# Altium PCB Sitara_Project_Rev_A_PCB.PcbDoc (part 8 of 9)
Units mm, origin at the board's own origin, x right, y up, seen from the top; angles counter-clockwise.
Board outline 120 x 85 mm, 8 copper layers (L1 (Sig), L2 (GND), L3 (PWR), L4 (Sig), L5 (GND), L6 (Sig), L7 (GND), L8 (Sig)), stack 1.188 mm thick; 458 components, 357 nets, 1916 pads, 1164 vias.
Unrouted connection lines stored in the file: 516.
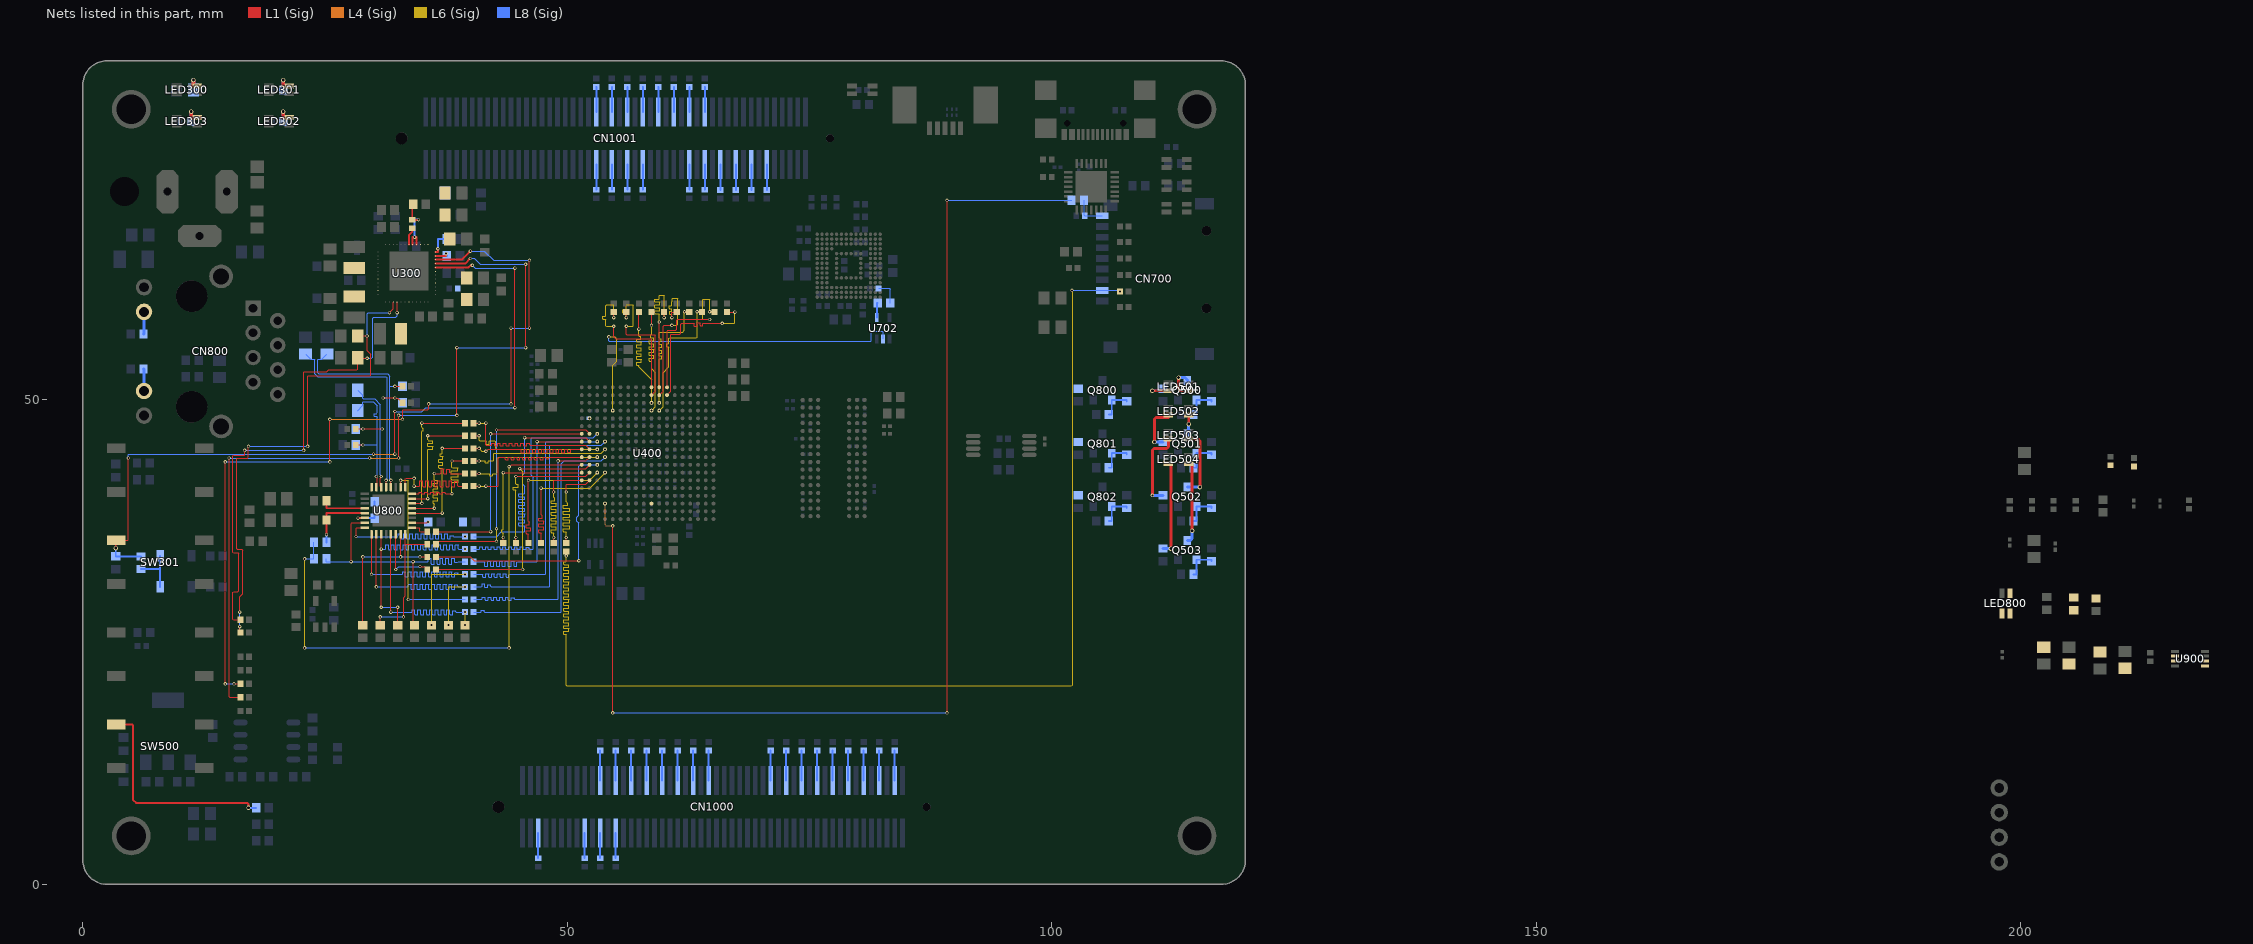
[diagram p11: the nets of this part, all layers, seen from the top]

## Via types
v1: diameter 0.35, hole 0.2, L1 (Sig) to L8 (Sig), tented both sides, 846 vias
v2: diameter 0.45, hole 0.3, L1 (Sig) to L8 (Sig), tented both sides, 302 vias
v3: diameter 0.45/0.45/0.45/0.45/0.45/0.45/0.45/0.45 (per signal layer), hole 0.3, L1 (Sig) to L8 (Sig), tented both sides, 16 vias

## Nets (pads, with @x,y where several pads share a name; then routed paths per layer and width w, separated by ;. In a path a pad name is that pad's centre, name@x,y a point inside that pad or via, vN(x,y) a via of type N, cw(c..) or ccw(c..) an arc to the next point about the centre after c; other vN are vias at no path point) (continued)
MICRO_SD_DAT3: CN700.2 R709.1 R716.2 | length 123.8
  L1 (Sig) w0.1: v1(49.9,33.9) R716.2@49.9,34.36
  L6 (Sig) w0.1: v1(49.9,33.9) 49.9,33.5 49.9,33.367 49.841,33.309 49.672,33.309 49.657,33.294 49.657,33.024 49.672,33.009 50.135,33.009 50.15,32.994 50.15,32.724 50.135,32.709 49.665,32.709 49.65,32.694 49.65,32.424 49.665,32.409 50.135,32.409 50.15,32.394 50.15,32.124 50.135,32.109 49.665,32.109 49.65,32.094 49.65,31.824 49.665,31.809 50.135,31.809 50.15,31.794 50.15,31.524 50.135,31.509 49.665,31.509 49.65,31.494 49.65,31.224 49.665,31.209 50.135,31.209 50.15,31.194 50.15,30.924 50.135,30.909 49.665,30.909 49.65,30.894 49.65,30.624 49.665,30.609 50.135,30.609 50.15,30.594 50.15,30.324 50.135,30.309 49.665,30.309 49.65,30.294 49.65,30.024 49.665,30.009 50.135,30.009 50.15,29.994 50.15,29.724 50.135,29.709 49.665,29.709 49.65,29.694 49.65,29.424 49.665,29.409 50.135,29.409 50.15,29.394 50.15,29.124 50.135,29.109 49.665,29.109 49.65,29.094 49.65,28.824 49.665,28.809 50.135,28.809 50.15,28.794 50.15,28.524 50.135,28.509 49.665,28.509 49.65,28.494 49.65,28.224 49.665,28.209 50.135,28.209 50.15,28.194 50.15,27.924 50.135,27.909 49.665,27.909 49.65,27.894 49.65,27.624 49.665,27.609 50.135,27.609 50.15,27.594 50.15,27.324 50.135,27.309 49.665,27.309 49.65,27.294 49.65,27.024 49.665,27.009 50.135,27.009 50.15,26.994 50.15,26.724 50.135,26.709 49.665,26.709 49.65,26.694 49.65,26.424 49.665,26.409 50.135,26.409 50.15,26.394 50.15,26.124 50.135,26.109 49.665,26.109 49.65,26.094 49.65,25.824 49.665,25.809 49.841,25.809 49.9,25.75 49.9,25.7 49.9,20.559 49.959,20.5 102.041,20.5 102.1,20.559 v1(102.1,61.3)
  L8 (Sig) w0.1: v1(102.1,61.3) 105.223,61.3 CN700.2@105.224,61.299 106.893,61.299 106.992,61.2 v1(107.06,61.2)
MII1_COL: R814.1 U400.H16 | length 26.8
  L1 (Sig) w0.1: R814.1@36.44,33.8 40,33.8 40.4,33.4 v1(51.2,33.4)
  L8 (Sig) w0.1: v1(51.2,33.4) 51.2,37.3 51,37.5 51,37.9 51.2,38.1 51.2,43.141 51.359,43.3 v1(53.1,43.3)
MII1_CRS_DV: R816.1 U400.H17 | length 26.8
  L1 (Sig) w0.1: R816.1@36.44,32.5 v1(45.4,32.5) ; v1(45.1,42.9) 51.9,42.9 U400.H17@52.3,43.3
  L6 (Sig) w0.1: v1(45.1,42.9) 45.4,42.6 v1(45.4,32.5)
MII1_MDIO_CLK: R818.1 U400.M18 | length 25.2
  L1 (Sig) w0.1: R818.1@36.44,36.4 v1(42.1,36.4) ; v1(42.1,46.5) U400.M18@51.5,46.5
  L8 (Sig) w0.1: v1(42.1,36.4) v1(42.1,46.5)
MII1_MDIO_DATA: R817.1 U400.M17 | length 27.7
  L1 (Sig) w0.1: R817.1@36.44,35.1 36.44,35.12 36.69,35.37 36.71,35.37 36.74,35.4 v1(42.7,35.4) ; v1(42.7,46.9) 51.9,46.9 U400.M17@52.3,46.5
  L6 (Sig) w0.1: v1(42.7,35.4) v1(42.7,36.7)
  L8 (Sig) w0.1: v1(42.7,36.7) v1(42.7,46.9)
MII1_REFCLK: R813.1 R815.1 U400.H18 | length 59.2
  L1 (Sig) w0.1: v1(44,43.1) 44.06,43.1 44.26,43.3 U400.H18@51.5,43.3
  L6 (Sig) w0.1: v1(22.9,24.4) v1(22.9,33.6) ; v1(44,24.4) v1(44,43.1)
  L8 (Sig) w0.1: v1(22.9,24.4) v1(44,24.4) ; v1(22.9,33.6) R813.1@23.85,33.6 R815.1@23.85,35.3
MII1_RXCLK: R806.1 U400.L18 | length 29.4
  L1 (Sig) w0.1: v1(46.9,45.7) U400.L18@51.5,45.7
  L8 (Sig) w0.1: R806.1@40.34,33.3 41.1,33.3 41.45,33.3 41.509,33.241 41.509,32.825 41.524,32.81 41.794,32.81 41.809,32.825 41.809,33.311 41.824,33.326 42.094,33.326 42.109,33.311 42.109,32.825 42.124,32.81 42.394,32.81 42.409,32.825 42.409,33.311 42.424,33.326 42.694,33.326 42.709,33.311 42.709,32.825 42.724,32.81 42.994,32.81 43.009,32.825 43.009,33.311 43.024,33.326 43.294,33.326 43.309,33.311 43.309,32.825 43.324,32.81 43.594,32.81 43.609,32.825 43.609,33.311 43.624,33.326 43.894,33.326 43.909,33.311 43.909,32.825 43.924,32.81 44.194,32.81 44.209,32.825 44.209,33.311 44.224,33.326 44.494,33.326 44.509,33.311 44.509,32.842 44.524,32.827 44.794,32.827 44.809,32.842 44.809,33.241 44.867,33.3 45.073,33.3 46.841,33.3 46.9,33.359 v1(46.9,45.7)
MII1_RXD0: R807.1 U400.M16 | length 29.4
  L8 (Sig) w0.1: R807.1@40.34,34.6 40.856,34.6 40.906,34.6 40.965,34.659 40.965,34.843 40.98,34.858 41.25,34.858 41.265,34.843 41.265,34.579 41.28,34.564 41.55,34.564 41.565,34.579 41.565,34.843 41.58,34.858 41.85,34.858 41.865,34.843 41.865,34.579 41.88,34.564 42.15,34.564 42.165,34.579 42.165,34.843 42.18,34.858 42.45,34.858 42.465,34.843 42.465,34.579 42.48,34.564 42.75,34.564 42.765,34.579 42.765,34.843 42.78,34.858 43.05,34.858 43.065,34.843 43.065,34.579 43.08,34.564 43.35,34.564 43.365,34.579 43.365,34.843 43.38,34.858 43.65,34.858 43.665,34.843 43.665,34.579 43.68,34.564 43.95,34.564 43.965,34.579 43.965,34.843 43.98,34.858 44.25,34.858 44.265,34.843 44.265,34.579 44.28,34.564 44.55,34.564 44.565,34.579 44.565,34.843 44.58,34.858 44.85,34.858 44.865,34.843 44.865,34.579 44.88,34.564 45.15,34.564 45.165,34.579 45.165,34.843 45.18,34.858 45.45,34.858 45.465,34.843 45.465,34.579 45.48,34.564 45.75,34.564 45.765,34.579 45.765,34.776 45.78,34.791 46.05,34.791 46.065,34.776 46.065,34.659 46.123,34.6 46.268,34.6 46.441,34.6 46.5,34.659 46.5,42 46.3,42.2 46.3,46.041 46.359,46.1 52.7,46.1 v1(53.1,46.5)
MII1_RXD1: R808.1 U400.L15 | length 29.4
  L8 (Sig) w0.1: R808.1@40.34,30.7 41.1,30.7 41.15,30.7 41.208,30.759 41.208,31.035 41.223,31.05 41.493,31.05 41.508,31.035 41.508,30.669 41.523,30.654 41.793,30.654 41.808,30.669 41.808,30.902 41.823,30.917 42.093,30.917 42.108,30.902 42.108,30.759 42.167,30.7 42.305,30.7 48.141,30.7 48.2,30.759 48.2,45.241 48.259,45.3 53.5,45.3 v1(53.9,45.7)
MII1_RXD2: R809.1 U400.L16 | length 29.4
  L8 (Sig) w0.1: R809.1@40.34,32 40.88,32 41.23,32 41.288,31.941 41.288,31.722 41.303,31.707 41.573,31.707 41.588,31.722 41.588,32.02 41.603,32.035 41.873,32.035 41.888,32.02 41.888,31.722 41.903,31.707 42.173,31.707 42.188,31.722 42.188,32.02 42.203,32.035 42.473,32.035 42.488,32.02 42.488,31.722 42.503,31.707 42.773,31.707 42.788,31.722 42.788,32.02 42.803,32.035 43.073,32.035 43.088,32.02 43.088,31.722 43.103,31.707 43.373,31.707 43.388,31.722 43.388,32.02 43.403,32.035 43.673,32.035 43.688,32.02 43.688,31.727 43.703,31.712 43.973,31.712 43.988,31.727 43.988,31.941 44.047,32 44.392,32 47.741,32 47.8,32.059 47.8,45.641 47.859,45.7 v1(53.1,45.7)
MII1_RXD3: R810.1 U400.L17 | length 29.4
  L1 (Sig) w0.1: v1(45.6,46.1) 51.9,46.1 U400.L17@52.3,45.7
  L8 (Sig) w0.1: R810.1@40.34,35.9 42.7,35.9 43.2,36.4 45.541,36.4 45.6,36.459 45.6,36.92 45.6,36.97 45.541,37.029 44.997,37.029 44.982,37.044 44.982,37.314 44.997,37.329 45.59,37.329 45.605,37.344 45.605,37.614 45.59,37.629 44.997,37.629 44.982,37.644 44.982,37.914 44.997,37.929 45.59,37.929 45.605,37.944 45.605,38.214 45.59,38.229 44.997,38.229 44.982,38.244 44.982,38.514 44.997,38.529 45.59,38.529 45.605,38.544 45.605,38.814 45.59,38.829 44.997,38.829 44.982,38.844 44.982,39.114 44.997,39.129 45.59,39.129 45.605,39.144 45.605,39.414 45.59,39.429 44.997,39.429 44.982,39.444 44.982,39.714 44.997,39.729 45.59,39.729 45.605,39.744 45.605,40.014 45.59,40.029 44.999,40.029 44.984,40.044 44.984,40.314 44.999,40.329 45.541,40.329 45.6,40.387 45.6,40.954 45.6,41.1 45.4,41.3 45.4,42.3 45.6,42.5 v1(45.6,46.1)
MII1_RXDV: R811.1 U400.J17 | length 29.4
  L1 (Sig) w0.1: v1(49.055,43.709) 49.063,43.7 51.9,43.7 U400.J17@52.3,44.1
  L8 (Sig) w0.1: R811.1@40.34,29.4 41.123,29.4 41.173,29.4 41.232,29.459 41.232,29.621 41.247,29.636 41.517,29.636 41.532,29.621 41.532,29.362 41.547,29.347 41.817,29.347 41.832,29.362 41.832,29.621 41.847,29.636 42.117,29.636 42.132,29.621 42.132,29.362 42.147,29.347 42.417,29.347 42.432,29.362 42.432,29.621 42.447,29.636 42.717,29.636 42.732,29.621 42.732,29.362 42.747,29.347 43.017,29.347 43.032,29.362 43.032,29.621 43.047,29.636 43.317,29.636 43.332,29.621 43.332,29.362 43.347,29.347 43.617,29.347 43.632,29.362 43.632,29.621 43.647,29.636 43.917,29.636 43.932,29.621 43.932,29.362 43.947,29.347 44.217,29.347 44.232,29.362 44.232,29.553 44.247,29.568 44.517,29.568 44.532,29.553 44.532,29.459 44.59,29.4 44.849,29.4 48.996,29.4 49.055,29.459 v1(49.055,43.709)
MII1_RXER: R812.1 U400.J15 | length 29.4
  L8 (Sig) w0.1: R812.1@40.34,28.1 41,28.1 41.05,28.1 41.109,28.159 41.109,28.251 41.124,28.266 41.394,28.266 41.409,28.251 41.409,28.159 41.467,28.1 41.646,28.1 49.341,28.1 49.4,28.159 49.4,43.4 49.7,43.7 53.5,43.7 v1(53.9,44.1)
MII1_TXCLK: R800.1 U400.K18 | length 17.8
  L1 (Sig) w0.1: R800.1@40.34,45 v1(40.9,45) ; v1(41.6,44.7) 41.66,44.7 41.86,44.9 44.835,44.9 45.185,44.9 45.243,44.841 45.243,44.539 45.258,44.524 45.528,44.524 45.543,44.539 45.543,44.896 45.558,44.911 45.828,44.911 45.843,44.896 45.843,44.539 45.858,44.524 46.128,44.524 46.143,44.539 46.143,44.896 46.158,44.911 46.428,44.911 46.443,44.896 46.443,44.539 46.458,44.524 46.728,44.524 46.743,44.539 46.743,44.896 46.758,44.911 47.028,44.911 47.043,44.896 47.043,44.539 47.058,44.524 47.328,44.524 47.343,44.539 47.343,44.896 47.358,44.911 47.628,44.911 47.643,44.896 47.643,44.539 47.658,44.524 47.928,44.524 47.943,44.539 47.943,44.896 47.958,44.911 48.228,44.911 48.243,44.896 48.243,44.539 48.258,44.524 48.528,44.524 48.543,44.539 48.543,44.896 48.558,44.911 48.828,44.911 48.843,44.896 48.843,44.539 48.858,44.524 49.128,44.524 49.143,44.539 49.143,44.896 49.158,44.911 49.428,44.911 49.443,44.896 49.443,44.539 49.458,44.524 49.728,44.524 49.743,44.539 49.743,44.896 49.758,44.911 50.028,44.911 50.043,44.896 50.043,44.597 50.058,44.582 50.328,44.582 50.343,44.597 50.343,44.841 50.402,44.9 50.995,44.9 U400.K18@51.5,44.9
  L6 (Sig) w0.1: v1(40.9,45) 41.2,44.7 v1(41.6,44.7)
MII1_TXD0: R802.1 U400.K17 | length 17.9
  L1 (Sig) w0.1: R802.1@40.34,47.6 v1(40.9,47.6) ; v1(41.6,47.6) 41.6,45.359 41.623,45.336 41.659,45.3 42.151,45.3 42.21,45.359 42.21,45.493 42.225,45.508 42.495,45.508 42.51,45.493 42.51,45.272 42.525,45.257 42.795,45.257 42.81,45.272 42.81,45.521 42.825,45.536 43.095,45.536 43.11,45.521 43.11,45.272 43.125,45.257 43.395,45.257 43.41,45.272 43.41,45.521 43.425,45.536 43.695,45.536 43.71,45.521 43.71,45.272 43.725,45.257 43.995,45.257 44.01,45.272 44.01,45.521 44.025,45.536 44.295,45.536 44.31,45.521 44.31,45.272 44.325,45.257 44.595,45.257 44.61,45.272 44.61,45.521 44.625,45.536 44.895,45.536 44.91,45.521 44.91,45.272 44.925,45.257 45.195,45.257 45.21,45.272 45.21,45.521 45.225,45.536 45.495,45.536 45.51,45.521 45.51,45.272 45.525,45.257 45.795,45.257 45.81,45.272 45.81,45.521 45.825,45.536 46.095,45.536 46.11,45.521 46.11,45.359 46.168,45.3 46.518,45.3 51.9,45.3 U400.K17@52.3,44.9
  L6 (Sig) w0.1: v1(40.9,47.6) v1(41.6,47.6)
MII1_TXD1: R803.1 U400.K16 | length 14.7
  L1 (Sig) w0.1: R803.1@40.34,46.3 v1(40.9,46.3)
  L6 (Sig) w0.1: v1(40.9,46.3) 40.9,45.859 40.959,45.8 41.444,45.8 41.605,45.8 41.663,45.741 41.663,45.421 41.678,45.406 41.948,45.406 41.963,45.421 41.963,45.741 42.022,45.8 42.072,45.8 42.541,45.8 42.6,45.741 42.6,45 42.7,44.9 v1(53.1,44.9)
MII1_TXD2: R804.1 U400.K15 | length 14.7
  L1 (Sig) w0.1: R804.1@40.34,43.7 v1(40.9,43.7)
  L6 (Sig) w0.1: v1(40.9,43.7) 41.141,43.7 41.491,43.7 41.55,43.641 41.55,43.533 41.565,43.518 41.835,43.518 41.85,43.533 41.85,43.641 41.909,43.7 42.106,43.7 42.341,43.7 42.4,43.759 42.4,44.441 42.459,44.5 53.5,44.5 v1(53.9,44.9)
MII1_TXD3: R805.1 U400.J18 | length 17.9
  L1 (Sig) w0.1: R805.1@40.34,41.1 v1(40.9,41.1) ; v1(41.6,41.1) 42.841,41.1 42.9,41.159 42.9,44 43,44.1 43.209,44.1 43.559,44.1 43.617,44.041 43.617,43.853 43.632,43.838 43.902,43.838 43.917,43.853 43.917,44.092 43.932,44.107 44.202,44.107 44.217,44.092 44.217,43.853 44.232,43.838 44.502,43.838 44.517,43.853 44.517,44.092 44.532,44.107 44.802,44.107 44.817,44.092 44.817,43.853 44.832,43.838 45.102,43.838 45.117,43.853 45.117,44.092 45.132,44.107 45.402,44.107 45.417,44.092 45.417,43.853 45.432,43.838 45.702,43.838 45.717,43.853 45.717,44.092 45.732,44.107 46.002,44.107 46.017,44.092 46.017,43.853 46.032,43.838 46.302,43.838 46.317,43.853 46.317,44.092 46.332,44.107 46.602,44.107 46.617,44.092 46.617,43.853 46.632,43.838 46.902,43.838 46.917,43.853 46.917,44.092 46.932,44.107 47.202,44.107 47.217,44.092 47.217,43.853 47.232,43.838 47.502,43.838 47.517,43.853 47.517,44.092 47.532,44.107 47.802,44.107 47.817,44.092 47.817,43.93 47.832,43.915 48.102,43.915 48.117,43.93 48.117,44.041 48.176,44.1 48.315,44.1 U400.J18@51.5,44.1
  L6 (Sig) w0.1: v1(40.9,41.1) v1(41.6,41.1)
MII1_TXEN: R801.1 U400.J16 | length 14.7
  L1 (Sig) w0.1: R801.1@40.34,42.4 v1(40.9,42.4)
  L6 (Sig) w0.1: v1(40.9,42.4) 41.584,42.4 41.934,42.4 41.993,42.341 41.993,42.2 42.008,42.185 42.278,42.185 42.293,42.2 42.293,42.341 42.351,42.4 42.681,42.4 42.741,42.4 42.8,42.459 42.8,44.041 42.859,44.1 v1(53.1,44.1)
MMC0_CD: R711.2 U400.C15 | length 122.6
  L1 (Sig) w0.1: v1(54.7,17.7) v1(54.7,37) ; v1(89.2,17.7) v1(89.2,70.6)
  L4 (Sig) w0.1: v1(53.9,39.3) 53.9,37.1 54,37 v1(54.7,37)
  L8 (Sig) w0.1: v1(54.7,17.7) v1(89.2,17.7) ; v1(89.2,70.6) R711.2@102.05,70.6
MMC0_CLK: R710.1 U400.G17 | length 15.5
  L1 (Sig) w0.1: R710.1@44.7,35.24 v1(44.7,35.8) ; v1(44.7,42.1) 51.9,42.1 U400.G17@52.3,42.5
  L6 (Sig) w0.1: v1(44.7,35.8) 44.7,40.6 44.7,40.65 44.641,40.709 44.465,40.709 44.45,40.724 44.45,40.994 44.465,41.009 44.925,41.009 44.94,41.024 44.94,41.294 44.925,41.309 44.759,41.309 44.7,41.367 44.7,41.6 v1(44.7,42.1)
MMC0_CMD: R712.1 U400.G18 | length 15.6
  L1 (Sig) w0.1: R712.1@43.4,35.24 v1(43.4,35.8) ; v1(43.4,42.5) U400.G18@51.5,42.5
  L6 (Sig) w0.1: v1(43.4,35.8) 43.4,36.2 43.4,36.25 43.341,36.309 43.269,36.309 43.254,36.324 43.254,36.594 43.269,36.609 43.341,36.609 43.4,36.667 43.4,36.8 v1(43.4,42.5)
MMC0_DAT0: R713.1 U400.G16 | length 15.4
  L1 (Sig) w0.1: R713.1@46,35.24 46,36.1 46,36.15 45.941,36.209 45.765,36.209 45.75,36.224 45.75,36.494 45.765,36.509 46.235,36.509 46.25,36.524 46.25,36.794 46.235,36.809 45.765,36.809 45.75,36.824 45.75,37.094 45.765,37.109 46.081,37.109 46.096,37.124 46.096,37.394 46.081,37.409 46.059,37.409 46,37.467 46,37.7 v1(46,41.7)
  L6 (Sig) w0.1: v1(46,41.7) 52.3,41.7 v1(53.1,42.5)
MMC0_DAT1: R714.1 U400.G15 | length 15.5
  L1 (Sig) w0.1: R714.1@47.3,35.24 47.3,36.2 47.3,36.25 47.241,36.309 47.065,36.309 47.05,36.324 47.05,36.594 47.065,36.609 47.535,36.609 47.55,36.624 47.55,36.894 47.535,36.909 47.065,36.909 47.05,36.924 47.05,37.194 47.065,37.209 47.535,37.209 47.55,37.224 47.55,37.494 47.535,37.509 47.065,37.509 47.05,37.524 47.05,37.794 47.065,37.809 47.402,37.809 47.417,37.824 47.417,38.094 47.402,38.109 47.359,38.109 47.3,38.167 47.3,38.5 v1(47.3,40.9)
  L6 (Sig) w0.1: v1(47.3,40.9) 52.3,40.9 v1(53.9,42.5)
MMC0_DAT2: R715.1 U400.F18 | length 14.8
  L1 (Sig) w0.1: R715.1@48.6,35.24 v1(48.6,35.8) ; v1(48.6,40.5) 48.6,41.641 48.659,41.7 U400.F18@51.5,41.7
  L6 (Sig) w0.1: v1(48.6,35.8) 48.6,36.2 48.6,36.25 48.541,36.309 48.365,36.309 48.35,36.324 48.35,36.594 48.365,36.609 48.835,36.609 48.85,36.624 48.85,36.894 48.835,36.909 48.365,36.909 48.35,36.924 48.35,37.194 48.365,37.209 48.835,37.209 48.85,37.224 48.85,37.494 48.835,37.509 48.365,37.509 48.35,37.524 48.35,37.794 48.365,37.809 48.835,37.809 48.85,37.824 48.85,38.094 48.835,38.109 48.365,38.109 48.35,38.124 48.35,38.394 48.365,38.409 48.835,38.409 48.85,38.424 48.85,38.694 48.835,38.709 48.365,38.709 48.35,38.724 48.35,38.994 48.365,39.009 48.835,39.009 48.85,39.024 48.85,39.294 48.835,39.309 48.365,39.309 48.35,39.324 48.35,39.594 48.365,39.609 48.714,39.609 48.729,39.624 48.729,39.894 48.714,39.909 48.659,39.909 48.6,39.967 48.6,40.2 v1(48.6,40.5)
MMC0_DAT3: R716.1 U400.F17 | length 14.7
  L1 (Sig) w0.1: R716.1@49.9,35.24 v1(49.9,35.8) ; v1(49.9,40.5) 49.9,41.241 49.959,41.3 51.9,41.3 U400.F17@52.3,41.7
  L6 (Sig) w0.1: v1(49.9,35.8) 49.9,36.3 49.9,36.35 49.841,36.409 49.578,36.409 49.563,36.424 49.563,36.694 49.578,36.709 50.219,36.709 50.234,36.724 50.234,36.994 50.219,37.009 49.578,37.009 49.563,37.024 49.563,37.294 49.578,37.309 50.219,37.309 50.234,37.324 50.234,37.594 50.219,37.609 49.578,37.609 49.563,37.624 49.563,37.894 49.578,37.909 50.219,37.909 50.234,37.924 50.234,38.194 50.219,38.209 49.578,38.209 49.563,38.224 49.563,38.494 49.578,38.509 50.219,38.509 50.234,38.524 50.234,38.794 50.219,38.809 49.578,38.809 49.563,38.824 49.563,39.094 49.578,39.109 50.025,39.109 50.04,39.124 50.04,39.394 50.025,39.409 49.959,39.409 49.9,39.467 49.9,39.707 v1(49.9,40.5)
MMC1_CLK: R719.2 U400.U9 | length 16.2
  L1 (Sig) w0.1: v1(56.1,57.6) 56.1,56.759 56.159,56.7 59.041,56.7 59.1,56.641 59.1,50.9 U400.U9@58.7,50.5 ; v1(56.1,58.5) R719.2@56.1,59.06
  L6 (Sig) w0.1: v1(56.1,57.6) 56.741,57.6 56.8,57.659 56.8,59.741 56.741,59.8 56.159,59.8 56.1,59.741 56.1,59.693 56.1,59.343 56.041,59.285 55.729,59.285 55.714,59.27 55.714,59 55.729,58.985 56.041,58.985 56.1,58.926 56.1,58.803 v1(56.1,58.5)
MMC1_CMD: R725.2 U400.V9 | length 16.2
  L1 (Sig) w0.1: v1(54.8,57.6) 54.8,56.5 55,56.3 58.641,56.3 58.7,56.241 U400.V9@58.7,51.3 ; v1(54.8,58.5) R725.2@54.8,59.06
  L6 (Sig) w0.1: v1(54.8,57.6) 54.059,57.6 54,57.659 54,58.232 54,58.282 53.941,58.341 53.669,58.341 53.654,58.356 53.654,58.626 53.669,58.641 53.941,58.641 54,58.7 54,59.48 54,59.741 54.059,59.8 54.741,59.8 54.8,59.741 v1(54.8,58.5)
MMC1_DAT0: R734.2 U400.U7 | length 17
  L1 (Sig) w0.1: U400.U7@60.3,50.5 60.7,50.9 60.7,56.741 60.759,56.8 61.6,56.8 61.7,56.9 61.7,57.8 61.8,57.9 62.697,57.9 63.047,57.9 63.106,57.841 63.106,57.629 63.121,57.614 63.391,57.614 63.406,57.629 63.406,57.938 63.421,57.953 63.691,57.953 63.706,57.938 63.706,57.689 63.721,57.674 63.991,57.674 64.006,57.689 64.006,57.841 64.064,57.9 64.3,57.9 v1(66,57.9) ; R734.2@66.5,59.06 v1(67.3,59.06)
  L6 (Sig) w0.1: v1(66,57.9) 67.241,57.9 67.3,57.959 v1(67.3,59.06)
MMC1_DAT1: R735.2 U400.V7 | length 16.4
  L1 (Sig) w0.1: U400.V7@60.3,51.3 60.3,57.104 60.396,57.2 61.2,57.2 61.3,57.3 61.3,58.2 61.4,58.3 v1(64.7,58.3) ; v1(64.7,59.1) 65.16,59.1 R735.2@65.2,59.06
  L6 (Sig) w0.1: v1(64.7,58.3) 64.1,58.3 64,58.4 64,60.341 64.059,60.4 64.641,60.4 64.7,60.341 v1(64.7,59.1)
MMC1_DAT2: R736.2 U400.R8 | length 14.3
  L1 (Sig) w0.1: v1(63.4,59.1) 63.86,59.1 R736.2@63.9,59.06
  L6 (Sig) w0.1: v1(59.5,48.9) 59.9,49.3 59.9,52.8 60.5,53.4 60.5,55.379 60.5,55.429 60.441,55.488 60.293,55.488 60.278,55.503 60.278,55.773 60.293,55.788 60.441,55.788 60.5,55.846 60.5,55.979 60.5,56.341 60.559,56.4 63.341,56.4 63.4,56.459 v1(63.4,59.1)
MMC1_DAT3: R737.2 U400.T8 | length 14.3
  L1 (Sig) w0.1: v1(62.1,59.1) 62.56,59.1 R737.2@62.6,59.06
  L6 (Sig) w0.1: v1(59.5,49.7) 59.5,53.826 59.5,54.176 59.559,54.235 59.735,54.235 59.75,54.25 59.75,54.52 59.735,54.535 59.489,54.535 59.474,54.55 59.474,54.82 59.489,54.835 59.735,54.835 59.75,54.85 59.75,55.12 59.735,55.135 59.489,55.135 59.474,55.15 59.474,55.42 59.489,55.435 59.735,55.435 59.75,55.45 59.75,55.72 59.735,55.735 59.489,55.735 59.474,55.75 59.474,56.02 59.489,56.035 59.713,56.035 59.728,56.05 59.728,56.32 59.713,56.335 59.559,56.335 59.5,56.394 59.5,56.7 59.5,56.941 59.559,57 61.9,57 62.1,57.2 v1(62.1,59.1)
MMC1_DAT4: R738.2 U400.U8 | length 16
  L1 (Sig) w0.1: U400.U8@59.5,50.5 59.9,50.9 59.9,57.6 60,57.7 v1(60.8,57.7) ; v1(60.8,58.5) 60.8,59 60.86,59.06 R738.2@61.3,59.06
  L6 (Sig) w0.1: v1(60.8,57.7) 61.3,57.7 61.4,57.8 61.4,60.441 61.341,60.5 60.899,60.5 60.84,60.441 60.84,60.182 60.801,60.142 ; v1(60.8,58.5) 60.8,58.7 60.8,58.775 60.741,58.834 60.59,58.834 60.575,58.849 60.575,59.119 60.59,59.134 60.787,59.134 60.802,59.149 60.802,59.419 60.787,59.434 60.545,59.434 60.53,59.449 60.53,59.719 60.545,59.734 60.741,59.734 60.8,59.792 60.8,60.141
MMC1_DAT5: R739.2 U400.V8 | length 15.5
  L1 (Sig) w0.1: U400.V8@59.5,51.3 v1(59.5,58.041) ; v1(60,58.5) R739.2@60,59.06
  L6 (Sig) w0.1: v1(59.5,58.041) 59.5,58.8 59.5,58.85 59.441,58.909 59.072,58.909 59.057,58.924 59.057,59.194 59.072,59.209 59.54,59.209 59.555,59.224 59.555,59.494 59.54,59.509 59.072,59.509 59.057,59.524 59.057,59.794 59.072,59.809 59.54,59.809 59.555,59.824 59.555,60.094 59.54,60.109 59.072,60.109 59.057,60.124 59.057,60.394 59.072,60.409 59.441,60.409 59.5,60.467 59.5,60.64 59.5,60.741 59.559,60.8 59.941,60.8 60,60.741 v1(60,58.5)
MMC1_DAT6: R740.2 U400.R9 | length 14.5
  L1 (Sig) w0.1: v1(58.7,57.7) R740.2@58.7,59.06
  L6 (Sig) w0.1: v1(58.7,48.9) 59.1,49.3 59.1,52.8 58.7,53.2 58.7,53.9 58.7,53.95 58.641,54.009 58.465,54.009 58.45,54.024 58.45,54.294 58.465,54.309 58.935,54.309 58.95,54.324 58.95,54.594 58.935,54.609 58.465,54.609 58.45,54.624 58.45,54.894 58.465,54.909 58.935,54.909 58.95,54.924 58.95,55.194 58.935,55.209 58.465,55.209 58.45,55.224 58.45,55.494 58.465,55.509 58.935,55.509 58.95,55.524 58.95,55.794 58.935,55.809 58.465,55.809 58.45,55.824 58.45,56.094 58.465,56.109 58.935,56.109 58.95,56.124 58.95,56.394 58.935,56.409 58.613,56.409 58.598,56.424 58.598,56.694 58.613,56.709 58.641,56.709 58.7,56.767 58.7,57.2 v1(58.7,57.7)
MMC1_DAT7: R741.2 U400.T9 | length 14.5
  L1 (Sig) w0.1: v1(57.4,57.3) R741.2@57.4,59.06
  L6 (Sig) w0.1: v1(57.4,57.3) 57.4,56.8 57.4,56.642 57.459,56.584 57.58,56.584 57.595,56.569 57.595,56.299 57.58,56.284 57.165,56.284 57.15,56.269 57.15,55.999 57.165,55.984 57.635,55.984 57.65,55.969 57.65,55.699 57.635,55.684 57.165,55.684 57.15,55.669 57.15,55.399 57.165,55.384 57.635,55.384 57.65,55.369 57.65,55.099 57.635,55.084 57.165,55.084 57.15,55.069 57.15,54.799 57.165,54.784 57.635,54.784 57.65,54.769 57.65,54.499 57.635,54.484 57.165,54.484 57.15,54.469 57.15,54.199 57.165,54.184 57.635,54.184 57.65,54.169 57.65,53.899 57.635,53.884 57.165,53.884 57.15,53.869 57.15,53.599 57.165,53.584 57.341,53.584 57.4,53.525 57.4,53.475 57.4,53.4 58.7,52.1 v1(58.7,49.7)
MMC1_nRST: R718.2 R724.2 | length 2.7
  L8 (Sig) w0.12: R724.2@82.14,61.5 83.28,61.5 83.35,61.43 R718.2@83.35,60
MMC1_RST: U400.R14 U702.2 | length 38.9
  L6 (Sig) w0.1: v1(54.3,56.5) 54.881,56.5 55.1,56.281 55.1,54 54.7,53.6 v1(54.7,48.9)
  L8 (Sig) w0.1: v1(54.3,56.5) 54.3,56.107 54.359,56.048 81.341,56.048 81.4,56.107 81.4,57.041 81.459,57.1 82.541,57.1 82.6,57.041 U702.2@82.6,56.3
NetCN700_9: CN700.9 R703.1 R711.1 | length 3.4
  L8 (Sig) w0.1: R711.1@103.35,70.6 103.35,69.06 R703.1@103.41,69 105.223,69 CN700.9@105.224,68.999
NetCN800_10: CN800.10 R849.2 | length 2.4
  L8 (Sig) w0.3: R849.2@6.25,56.8 6.32,56.8 CN800.10@6.32,59.09
NetCN800_11: CN800.11 R850.2 | length 2.4
  L8 (Sig) w0.3: R850.2@6.25,53.2 6.32,53.2 CN800.11@6.32,50.92
NetCN1000_6: CN1000.6 R1003.1 | length 2.6
  L8 (Sig) w0.2: R1003.1@47,2.69 CN1000.6@47,5.3
NetCN1000_18: CN1000.18 R1009.1 | length 2.6
  L8 (Sig) w0.2: R1009.1@51.8,2.69 CN1000.18@51.8,5.3
NetCN1000_21: CN1000.21 R1010.2 | length 3.1
  L8 (Sig) w0.2: CN1000.21@53.4,10.7 R1010.2@53.4,13.81
NetCN1000_22: CN1000.22 R1011.1 | length 2.6
  L8 (Sig) w0.2: R1011.1@53.4,2.69 CN1000.22@53.4,5.3
NetCN1000_25: CN1000.25 R1012.2 | length 3.1
  L8 (Sig) w0.2: CN1000.25@55,10.7 R1012.2@55,13.81
NetCN1000_26: CN1000.26 R1013.1 | length 2.6
  L8 (Sig) w0.2: R1013.1@55,2.69 CN1000.26@55,5.3
NetCN1000_29: CN1000.29 R1014.2 | length 3.1
  L8 (Sig) w0.2: CN1000.29@56.6,10.7 R1014.2@56.6,13.81
NetCN1000_33: CN1000.33 R1016.2 | length 3.1
  L8 (Sig) w0.2: CN1000.33@58.2,10.7 R1016.2@58.2,13.81
NetCN1000_37: CN1000.37 R1018.2 | length 3.1
  L8 (Sig) w0.2: CN1000.37@59.8,10.7 R1018.2@59.8,13.81
NetCN1000_41: CN1000.41 R1020.2 | length 3.1
  L8 (Sig) w0.2: CN1000.41@61.4,10.7 R1020.2@61.4,13.81
NetCN1000_45: CN1000.45 R1022.2 | length 3.1
  L8 (Sig) w0.2: CN1000.45@63,10.7 R1022.2@63,13.81
NetCN1000_49: CN1000.49 R1023.2 | length 3.1
  L8 (Sig) w0.2: CN1000.49@64.6,10.7 R1023.2@64.6,13.81
NetCN1000_65: CN1000.65 R1029.2 | length 3.1
  L8 (Sig) w0.2: CN1000.65@71,10.7 R1029.2@71,13.81
NetCN1000_69: CN1000.69 R1032.2 | length 3.1
  L8 (Sig) w0.2: CN1000.69@72.6,10.7 R1032.2@72.6,13.81
NetCN1000_73: CN1000.73 R1035.2 | length 3.1
  L8 (Sig) w0.2: CN1000.73@74.2,10.7 R1035.2@74.2,13.81
NetCN1000_77: CN1000.77 R1038.2 | length 3.1
  L8 (Sig) w0.2: CN1000.77@75.8,10.7 R1038.2@75.8,13.81
NetCN1000_81: CN1000.81 R1041.2 | length 3.1
  L8 (Sig) w0.2: CN1000.81@77.4,10.7 R1041.2@77.4,13.81
NetCN1000_85: CN1000.85 R1044.2 | length 3.1
  L8 (Sig) w0.2: CN1000.85@79,10.7 R1044.2@79,13.81
NetCN1000_89: CN1000.89 R1047.2 | length 3.1
  L8 (Sig) w0.2: CN1000.89@80.6,10.7 R1047.2@80.6,13.81
NetCN1000_93: CN1000.93 R1050.2 | length 3.1
  L8 (Sig) w0.2: CN1000.93@82.2,10.7 R1050.2@82.2,13.81
NetCN1000_97: CN1000.97 R1052.2 | length 3.1
  L8 (Sig) w0.2: CN1000.97@83.8,10.7 R1052.2@83.8,13.81
NetCN1001_45: CN1001.45 R1027.2 | length 2.6
  L8 (Sig) w0.2: CN1001.45@53,79.7 R1027.2@53,82.31
NetCN1001_46: CN1001.46 R1028.1 | length 2.6
  L8 (Sig) w0.2: R1028.1@53,71.69 CN1001.46@53,74.3
NetCN1001_49: CN1001.49 R1030.2 | length 2.6
  L8 (Sig) w0.2: CN1001.49@54.6,79.7 R1030.2@54.6,82.31
NetCN1001_50: CN1001.50 R1031.1 | length 2.6
  L8 (Sig) w0.2: R1031.1@54.6,71.69 CN1001.50@54.6,74.3
NetCN1001_53: CN1001.53 R1033.2 | length 2.6
  L8 (Sig) w0.2: CN1001.53@56.2,79.7 R1033.2@56.2,82.31
NetCN1001_54: CN1001.54 R1034.1 | length 2.6
  L8 (Sig) w0.2: R1034.1@56.2,71.69 CN1001.54@56.2,74.3
NetCN1001_57: CN1001.57 R1036.2 | length 2.6
  L8 (Sig) w0.2: CN1001.57@57.8,79.7 R1036.2@57.8,82.31
NetCN1001_58: CN1001.58 R1037.1 | length 2.6
  L8 (Sig) w0.2: R1037.1@57.8,71.69 CN1001.58@57.8,74.3
NetCN1001_61: CN1001.61 R1039.2 | length 2.6
  L8 (Sig) w0.2: CN1001.61@59.4,79.7 R1039.2@59.4,82.31
NetCN1001_65: CN1001.65 R1042.2 | length 2.6
  L8 (Sig) w0.2: CN1001.65@61,79.7 R1042.2@61,82.31
NetCN1001_69: CN1001.69 R1045.2 | length 2.6
  L8 (Sig) w0.2: CN1001.69@62.6,79.7 R1045.2@62.6,82.31
NetCN1001_70: CN1001.70 R1046.1 | length 2.6
  L8 (Sig) w0.2: R1046.1@62.6,71.69 CN1001.70@62.6,74.3
NetCN1001_73: CN1001.73 R1048.2 | length 2.6
  L8 (Sig) w0.2: CN1001.73@64.2,79.7 R1048.2@64.2,82.31
NetCN1001_74: CN1001.74 R1049.1 | length 2.6
  L8 (Sig) w0.2: R1049.1@64.2,71.69 CN1001.74@64.2,74.3
NetCN1001_78: CN1001.78 R1019.1 | length 2.6
  L8 (Sig) w0.2: R1019.1@65.8,71.68 CN1001.78@65.8,74.3
NetCN1001_82: CN1001.82 R1021.1 | length 2.6
  L8 (Sig) w0.2: R1021.1@67.4,71.68 CN1001.82@67.4,74.3
NetCN1001_86: CN1001.86 R1015.1 | length 2.6
  L8 (Sig) w0.2: R1015.1@69,71.68 CN1001.86@69,74.3
NetCN1001_90: CN1001.90 R1017.1 | length 2.6
  L8 (Sig) w0.2: R1017.1@70.6,71.68 CN1001.90@70.6,74.3
NetD300_2: D300.2 D301.2 R304.2 | length 5.2
  L8 (Sig) w0.2: R304.2@6,32.55 7.98,32.55 ; D301.2@7.98,30.7 7.98,32.55 ; D300.2@7.98,33.9 7.98,32.55
NetLED300_2: LED300.2 R306.2 | length 2
  L1 (Sig) w0.4: v2(11.413,83) 11.413,82.4 LED300.2@11.8,82.4
  L8 (Sig) w0.4: R306.2@11.413,82 v2(11.413,83)
NetLED301_2: LED301.2 R318.2 | length 2.2
  L1 (Sig) w0.4: v2(20.688,83) 20.688,82.4 LED301.2@21.3,82.4
  L8 (Sig) w0.4: R318.2@20.688,82 v2(20.688,83)
NetLED302_2: LED302.2 R331.2 | length 2.2
  L1 (Sig) w0.4: v2(20.688,79.75) 20.688,79.15 LED302.2@21.3,79.15
  L8 (Sig) w0.4: R331.2@20.688,78.75 v2(20.688,79.75)
NetLED303_2: LED303.2 R334.2 | length 2.2
  L1 (Sig) w0.4: v2(11.188,79.75) 11.188,79.15 LED303.2@11.8,79.15
  L8 (Sig) w0.4: R334.2@11.188,78.75 v2(11.188,79.75)
NetLED501_3: LED501.3 Q500.3 | length 3.4
  L1 (Sig) w0.3: v2(113.1,52.3) 113.1,51.126 113.276,50.95 LED501.3@114.15,50.95
  L8 (Sig) w0.3: v2(113.1,52.3) 113.75,52.3 114,52.05 Q500.3@114,52
NetLED501_4: LED501.4 R539.2 | length 3
  L1 (Sig) w0.3: v2(110.4,50.95) LED501.4@112.05,50.95
  L8 (Sig) w0.3: v2(110.4,50.95) 111.5,50.95 R539.2@111.5,51.15
NetLED502_3: LED502.3 Q501.3 | length 2
  L1 (Sig) w0.3: v2(114.15,47.5) LED502.3@114.15,48.45
  L8 (Sig) w0.3: Q501.3@114,46.5 114.121,46.621 114.121,47.471 v2(114.15,47.5)
NetLED502_4: LED502.4 R546.2 | length 5
  L1 (Sig) w0.3: v2(110.6,45.65) 110.6,48.024 110.776,48.2 112.05,48.2 LED502.4@112.05,48.45
  L8 (Sig) w0.3: v2(110.6,45.65) R546.2@111.5,45.65
NetLED503_3: LED503.3 Q502.3 | length 7.3
  L1 (Sig) w0.3: LED503.3@114.15,45.95 115.124,45.95 115.3,45.774 v2(115.3,41)
  L8 (Sig) w0.3: Q502.3@114,41 v2(115.3,41)
NetLED503_4: LED503.4 R549.2 | length 8.3
  L1 (Sig) w0.3: v1(110.4,40.15) 110.4,44.824 110.576,45 111.874,45 112.05,45.176 LED503.4@112.05,45.95
  L8 (Sig) w0.3: v1(110.4,40.15) R549.2@111.5,40.15
NetLED504_3: LED504.3 Q503.3 | length 8.6
  L1 (Sig) w0.3: LED504.3@114.15,43.45 114.4,43.45 114.5,43.35 v2(114.5,36.5)
  L8 (Sig) w0.3: Q503.3@114,35.5 114.324,35.5 114.5,35.676 v2(114.5,36.5)
NetLED504_4: LED504.4 R554.2 | length 9.9
  L1 (Sig) w0.3: LED504.4@112.05,43.45 112.1,43.5 112.3,43.5 v2(112.3,34.65)
  L8 (Sig) w0.3: R554.2@111.5,34.65 v2(112.3,34.65)
NetLED800_1: LED800.1 R838.1
NetLED800_2: LED800.2 R835.1
NetLED800_3: LED800.3 R833.1
NetQ500_1: Q500.1 R542.1 R544.2 | length 3.5
  L8 (Sig) w0.2: R542.1@114.65,48.5 114.95,48.5 Q500.1@114.95,50 116.5,50 R544.2@116.5,49.85
NetQ501_1: Q501.1 R547.1 R548.2 | length 3.5
  L8 (Sig) w0.2: R547.1@114.65,43 114.95,43 Q501.1@114.95,44.5 116.5,44.5 R548.2@116.5,44.35
NetQ502_1: Q502.1 R551.1 R552.2 | length 3.5
  L8 (Sig) w0.2: R551.1@114.65,37.5 114.95,37.5 Q502.1@114.95,39 116.5,39 R552.2@116.5,38.85
NetQ503_1: Q503.1 R555.1 R556.2 | length 3.5
  L8 (Sig) w0.2: R555.1@114.65,32 114.95,32 Q503.1@114.95,33.5 116.5,33.5 R556.2@116.5,33.35
NetQ800_1: Q800.1 R847.1 R848.2 | length 3.5
  L8 (Sig) w0.2: R847.1@105.9,48.5 106.2,48.5 Q800.1@106.2,50 107.75,50 R848.2@107.75,49.85
NetQ801_1: Q801.1 R851.1 R852.2 | length 3.5
  L8 (Sig) w0.2: R851.1@105.9,43 106.2,43 Q801.1@106.2,44.5 107.75,44.5 R852.2@107.75,44.35
NetQ802_1: Q802.1 R853.1 R854.2 | length 3.5
  L8 (Sig) w0.2: R853.1@105.9,37.5 106.2,37.5 Q802.1@106.2,39 107.75,39 R854.2@107.75,38.85
NetR307_1: R307.1 R308.2 U300.4 U300.5 | length 6.5
  L1 (Sig) w0.2: U300.5@34.048,66.05 34.048,66.8 v1(34.25,66.8) 34.448,66.8 U300.4@34.448,66.05 ; R307.1@34.1,70.2 34,70.2 R308.2@34,68.59 34.65,68.59 v1(34.65,68.6)
  L8 (Sig) w0.2: v1(34.25,66.8) 34.25,68.6 v1(34.65,68.6)
NetR308_1: R308.1 U300.6 | length 1.8
  L1 (Sig) w0.2: U300.6@33.648,66.05 33.652,66.053 33.652,67.002 34,67.35 R308.1@34,67.71
NetR517_1: R517.1 SW500.1 | length 22.7
  L1 (Sig) w0.2: SW500.1@3.45,16.5 5.083,16.5 5.2,16.383 5.2,8.7 5.5,8.4 16.983,8.4 17.1,8.283 v2(17.1,7.9)
  L8 (Sig) w0.2: v2(17.1,7.9) R517.1@17.9,7.9
NetR518_1: R518.1 R519.1 U400.C9
NetR521_1: R521.1 U400.P17
  other v1: 52.3,48.1
NetR718_1: R718.1 U702.4 | length 1.6
  L8 (Sig) w0.2: U702.4@81.95,58.5 81.95,60 R718.1@82.05,60
NetR822_2: R822.2 R823.2
NetR900_2: R900.2 U900.2
NetR901_1: R901.1 U900.6
NetR902_2: R902.2 U900.5
NetR903_1: R903.1 U900.3
PHY_CRS: R816.2 U800.14 | length 7.2
  L1 (Sig) w0.1: v1(32.3,32.5) U800.14@32.3,36.13 ; v1(34.8,32.8) 35.26,32.8 35.29,32.77 35.31,32.77 35.56,32.52 R816.2@35.56,32.5
  L8 (Sig) w0.1: v1(32.3,32.5) 32.6,32.8 v1(34.8,32.8)
PHY_MDC: R818.2 U800.17 | length 1.9
  L1 (Sig) w0.1: U800.17@33.985,36.815 34.741,36.815 34.8,36.756 34.8,36.459 34.859,36.4 R818.2@35.56,36.4
PHY_MDIO: R817.2 R825.1 U800.16 | length 14.1
  L1 (Sig) w0.1: R825.1@30.7,26.75 v1(30.7,27.6) ; v1(33.1,27.6) 33.1,29.6 33.3,29.8 33.3,35.1 ; U800.16@33.3,36.13 33.3,35.1 ; R817.2@35.56,35.1 33.3,35.1
  L8 (Sig) w0.1: v1(30.7,27.6) v1(33.1,27.6)
PHY_MODE2: R814.2 R826.1 U800.15 | length 16
  L1 (Sig) w0.1: R826.1@28.9,26.75 v1(28.9,33.8) ; v1(32.8,33.8) U800.15@32.8,36.13 ; v1(34.8,33.8) R814.2@35.56,33.8
  L8 (Sig) w0.1: v1(28.9,33.8) v1(32.8,33.8) v1(34.8,33.8)
PHY_RBIAS: R822.1 U800.32
PHY_RX_N: C812.2 R842.1 R846.1 U800.30 | length 15.4
  L1 (Sig) w0.1: R842.1@28.175,47 v1(28.9,47) v1(30.9,47) ; U800.30@30.8,41 30.72,41.08 30.72,41.419 30.7,41.439 30.7,41.653 30.7,41.932 30.8,42.032 v1(30.8,42.1)
  L8 (Sig) w0.1: C812.2@28.175,47 v1(28.9,47) ; R846.1@28.375,51 28.9,50.475 28.9,50.159 28.959,50.1 30.124,50.1 30.7,49.524 30.7,42.268 30.8,42.168 v1(30.8,42.1) ; 30.7,47 v1(30.9,47)
PHY_RX_P: C811.2 R841.1 R845.1 U800.31 | length 14.8
  L1 (Sig) w0.1: R841.1@28.175,45.35 v1(28.9,45.35) ; U800.31@30.3,41 30.38,41.08 30.38,41.419 30.4,41.439 30.4,41.777 30.4,41.932 30.3,42.032 v1(30.3,42.1)
  L8 (Sig) w0.1: C811.2@28.175,45.35 v1(28.9,45.35) 30.4,45.35 30.4,45.3 ; R845.1@28.375,48.9 28.9,49.425 28.9,49.741 28.959,49.8 30,49.8 30.4,49.4 30.4,49 30.4,48.65 30.341,48.591 30.115,48.591 30.1,48.576 30.1,48.306 30.115,48.291 30.341,48.291 30.4,48.233 30.4,47.8 30.4,45.3 ; v1(30.3,42.1) 30.3,42.168 30.4,42.268 30.4,45.3
PHY_RXCLK: R806.2 R813.2 R829.1 U800.7 | length 32.2
  L1 (Sig) w0.1: v1(27.7,33.3) 27.7,37.241 27.759,37.3 29.1,37.3 U800.7@29.115,37.315 ; v1(34.1,33.3) 34.1,26.75 R829.1@34.25,26.75
  L8 (Sig) w0.1: R813.2@25.15,33.6 25.15,33.3 v1(27.7,33.3) v1(34.1,33.3) 35.564,33.3 35.614,33.3 35.672,33.359 35.672,33.648 35.687,33.663 35.957,33.663 35.972,33.648 35.972,33.065 35.987,33.05 36.257,33.05 36.272,33.065 36.272,33.648 36.287,33.663 36.557,33.663 36.572,33.648 36.572,33.065 36.587,33.05 36.857,33.05 36.872,33.065 36.872,33.648 36.887,33.663 37.157,33.663 37.172,33.648 37.172,33.065 37.187,33.05 37.457,33.05 37.472,33.065 37.472,33.648 37.487,33.663 37.757,33.663 37.772,33.648 37.772,33.065 37.787,33.05 38.057,33.05 38.072,33.065 38.072,33.64 38.087,33.655 38.357,33.655 38.372,33.64 38.372,33.241 38.387,33.226 38.657,33.226 38.672,33.241 38.731,33.3 38.9,33.3 R806.2@39.46,33.3
PHY_RXD0/MODE0: R807.2 R828.1 U800.11 | length 32.2
  L1 (Sig) w0.1: v1(30.8,28.6) v1(30.8,34.6) U800.11@30.8,36.13 ; R828.1@32.5,26.75 v1(32.5,28.6)
  L8 (Sig) w0.1: v1(30.8,28.6) v1(32.5,28.6) ; v1(30.8,34.6) 31.15,34.6 31.2,34.6 31.259,34.659 31.259,35.035 31.274,35.05 31.544,35.05 31.559,35.035 31.559,34.561 31.574,34.546 31.844,34.546 31.859,34.561 31.859,35.035 31.874,35.05 32.144,35.05 32.159,35.035 32.159,34.561 32.174,34.546 32.444,34.546 32.459,34.561 32.459,35.035 32.474,35.05 32.744,35.05 32.759,35.035 32.759,34.561 32.774,34.546 33.044,34.546 33.059,34.561 33.059,35.035 33.074,35.05 33.344,35.05 33.359,35.035 33.359,34.561 33.374,34.546 33.644,34.546 33.659,34.561 33.659,35.035 33.674,35.05 33.944,35.05 33.959,35.035 33.959,34.561 33.974,34.546 34.244,34.546 34.259,34.561 34.259,35.035 34.274,35.05 34.544,35.05 34.559,35.035 34.559,34.561 34.574,34.546 34.844,34.546 34.859,34.561 34.859,35.035 34.874,35.05 35.144,35.05 35.159,35.035 35.159,34.561 35.174,34.546 35.444,34.546 35.459,34.561 35.459,35.035 35.474,35.05 35.744,35.05 35.759,35.035 35.759,34.561 35.774,34.546 36.044,34.546 36.059,34.561 36.059,35.035 36.074,35.05 36.344,35.05 36.359,35.035 36.359,34.561 36.374,34.546 36.644,34.546 36.659,34.561 36.659,35.035 36.674,35.05 36.944,35.05 36.959,35.035 36.959,34.561 36.974,34.546 37.244,34.546 37.259,34.561 37.259,35.035 37.274,35.05 37.544,35.05 37.559,35.035 37.559,34.561 37.574,34.546 37.844,34.546 37.859,34.561 37.859,35.035 37.874,35.05 38.144,35.05 38.159,35.035 38.159,34.561 38.174,34.546 38.444,34.546 38.459,34.561 38.459,35.018 38.474,35.033 38.744,35.033 38.759,35.018 38.759,34.659 38.817,34.6 38.9,34.6 v1(39.46,34.6)
PHY_RXD1/MODE1: R808.2 R827.1 U800.10 | length 28.1
  L1 (Sig) w0.1: v1(30.3,30.7) U800.10@30.3,36.13
  L6 (Sig) w0.1: v1(37.75,26.75) 37.75,30.7 v1(39.46,30.7)
  L8 (Sig) w0.1: v1(30.3,30.7) 33.496,30.7 33.546,30.7 33.605,30.759 33.605,30.935 33.62,30.95 33.89,30.95 33.905,30.935 33.905,30.465 33.92,30.45 34.19,30.45 34.205,30.465 34.205,30.935 34.22,30.95 34.49,30.95 34.505,30.935 34.505,30.465 34.52,30.45 34.79,30.45 34.805,30.465 34.805,30.935 34.82,30.95 35.09,30.95 35.105,30.935 35.105,30.465 35.12,30.45 35.39,30.45 35.405,30.465 35.405,30.935 35.42,30.95 35.69,30.95 35.705,30.935 35.705,30.465 35.72,30.45 35.99,30.45 36.005,30.465 36.005,30.935 36.02,30.95 36.29,30.95 36.305,30.935 36.305,30.465 36.32,30.45 36.59,30.45 36.605,30.465 36.605,30.935 36.62,30.95 36.89,30.95 36.905,30.935 36.905,30.465 36.92,30.45 37.19,30.45 37.205,30.465 37.205,30.935 37.22,30.95 37.49,30.95 37.505,30.935 37.505,30.465 37.52,30.45 37.79,30.45 37.805,30.465 37.805,30.935 37.82,30.95 38.09,30.95 38.105,30.935 38.105,30.465 38.12,30.45 38.39,30.45 38.405,30.465 38.405,30.906 38.42,30.921 38.69,30.921 38.705,30.906 38.705,30.759 38.764,30.7 R808.2@39.2,30.7
PHY_RXD2/RMIISEL: R809.2 R830.1 U800.9 | length 31.4
  L1 (Sig) w0.1: v1(29.8,32) U800.9@29.8,36.13
  L6 (Sig) w0.1: v1(36,26.75) 36,32 v1(39.46,32)
  L8 (Sig) w0.1: v1(29.8,32) 32.897,32 32.947,32 33.005,32.059 33.005,32.235 33.02,32.25 33.29,32.25 33.305,32.235 33.305,31.765 33.32,31.75 33.59,31.75 33.605,31.765 33.605,32.235 33.62,32.25 33.89,32.25 33.905,32.235 33.905,31.765 33.92,31.75 34.19,31.75 34.205,31.765 34.205,32.235 34.22,32.25 34.49,32.25 34.505,32.235 34.505,31.765 34.52,31.75 34.79,31.75 34.805,31.765 34.805,32.235 34.82,32.25 35.09,32.25 35.105,32.235 35.105,31.765 35.12,31.75 35.39,31.75 35.405,31.765 35.405,32.235 35.42,32.25 35.69,32.25 35.705,32.235 35.705,31.765 35.72,31.75 35.99,31.75 36.005,31.765 36.005,32.235 36.02,32.25 36.29,32.25 36.305,32.235 36.305,31.765 36.32,31.75 36.59,31.75 36.605,31.765 36.605,32.235 36.62,32.25 36.89,32.25 36.905,32.235 36.905,31.765 36.92,31.75 37.19,31.75 37.205,31.765 37.205,32.235 37.22,32.25 37.49,32.25 37.505,32.235 37.505,31.765 37.52,31.75 37.79,31.75 37.805,31.765 37.805,32.235 37.82,32.25 38.09,32.25 38.105,32.235 38.105,31.765 38.12,31.75 38.39,31.75 38.405,31.765 38.405,32.124 38.42,32.139 38.69,32.139 38.705,32.124 38.705,32.059 38.764,32 39,32 v1(39.46,32)
PHY_RXD3/PHYAD2: R810.2 R831.1 U800.8 | length 22.7
  L1 (Sig) w0.1: v1(28.2,35.9) 28.2,36.756 28.259,36.815 U800.8@29.115,36.815
  L8 (Sig) w0.1: v1(28.2,35.9) 32.438,35.9 32.488,35.9 32.546,35.959 32.546,36.183 32.561,36.198 32.831,36.198 32.846,36.183 32.846,35.665 32.861,35.65 33.131,35.65 33.146,35.665 33.146,36.183 33.161,36.198 33.431,36.198 33.446,36.183 33.446,35.665 33.461,35.65 33.731,35.65 33.746,35.665 33.746,36.183 33.761,36.198 34.031,36.198 34.046,36.183 34.046,35.665 34.061,35.65 34.331,35.65 34.346,35.665 34.346,36.183 34.361,36.198 34.631,36.198 34.646,36.183 34.646,35.665 34.661,35.65 34.931,35.65 34.946,35.665 34.946,36.183 34.961,36.198 35.231,36.198 35.246,36.183 35.246,35.665 35.261,35.65 35.531,35.65 35.546,35.665 35.546,36.183 35.561,36.198 35.831,36.198 35.846,36.183 35.846,35.665 35.861,35.65 36.131,35.65 36.146,35.665 36.146,36.183 36.161,36.198 36.431,36.198 36.446,36.183 36.446,35.665 36.461,35.65 36.731,35.65 36.746,35.665 36.746,36.183 36.761,36.198 37.031,36.198 37.046,36.183 37.046,35.665 37.061,35.65 37.331,35.65 37.346,35.665 37.346,36.183 37.361,36.198 37.631,36.198 37.646,36.183 37.646,35.668 37.661,35.653 37.931,35.653 37.946,35.668 37.946,35.959 37.961,35.974 38.231,35.974 38.246,35.959 38.305,35.9 38.806,35.9 v1(39.46,35.9)
PHY_RXDV: R811.2 U800.26 | length 19.6
  L1 (Sig) w0.1: U800.26@32.8,41 v1(32.8,41.7)
  L6 (Sig) w0.1: v1(32.8,41.7) 33.541,41.7 33.6,41.641 v1(33.6,29.4)
  L8 (Sig) w0.1: v1(33.6,29.4) R811.2@39.46,29.4
PHY_RXER/PHYAD0: R812.2 R832.1 U800.13 | length 24
  L1 (Sig) w0.1: v1(31.8,28.1) U800.13@31.8,36.13
  L6 (Sig) w0.1: v1(39.46,26.75) v1(39.46,28.1)
  L8 (Sig) w0.1: v1(31.8,28.1) 33.877,28.1 33.927,28.1 33.985,28.159 33.985,28.335 34,28.35 34.27,28.35 34.285,28.335 34.285,27.865 34.3,27.85 34.57,27.85 34.585,27.865 34.585,28.335 34.6,28.35 34.87,28.35 34.885,28.335 34.885,27.865 34.9,27.85 35.17,27.85 35.185,27.865 35.185,28.335 35.2,28.35 35.47,28.35 35.485,28.335 35.485,27.865 35.5,27.85 35.77,27.85 35.785,27.865 35.785,28.335 35.8,28.35 36.07,28.35 36.085,28.335 36.085,27.865 36.1,27.85 36.37,27.85 36.385,27.865 36.385,28.335 36.4,28.35 36.67,28.35 36.685,28.335 36.685,27.865 36.7,27.85 36.97,27.85 36.985,27.865 36.985,28.335 37,28.35 37.27,28.35 37.285,28.335 37.285,27.865 37.3,27.85 37.57,27.85 37.585,27.865 37.585,28.335 37.6,28.35 37.87,28.35 37.885,28.335 37.885,27.865 37.9,27.85 38.17,27.85 38.185,27.865 38.185,28.238 38.2,28.253 38.47,28.253 38.485,28.238 38.485,28.159 38.544,28.1 38.8,28.1 v1(39.46,28.1)
PHY_TX_N: C810.2 R840.1 R844.1 U800.28 | length 23.7
  L1 (Sig) w0.1: U800.28@31.8,41 v1(31.8,41.7) ; v1(32.2,51.4) R840.1@33,51.4
  L8 (Sig) w0.1: R844.1@25.2,54.725 24.675,54.2 24.309,54.2 24.25,54.141 24.25,52.8 24.35,52.7 31.466,52.7 31.7,52.466 31.7,51.4 ; v1(31.8,41.7) 31.8,41.768 31.7,41.868 31.7,42.5 31.7,51.4 ; C810.2@33,51.4 v1(32.2,51.4) 31.7,51.4
PHY_TX_P: C809.2 R839.1 R843.1 U800.29 | length 25.3
  L1 (Sig) w0.1: v1(31,50.2) v1(32.2,50.2) 32.225,50.175 32.525,50.175 32.73,49.97 32.75,49.97 33,49.72 R839.1@33,49.7 ; U800.29@31.3,41 v1(31.3,41.7)
  L8 (Sig) w0.1: R843.1@23,54.725 23.525,54.2 23.891,54.2 23.95,54.141 23.95,52.676 24.226,52.4 31.341,52.4 31.4,52.341 31.4,50.2 ; v1(31,50.2) 31.4,50.2 ; v1(31.3,41.7) 31.3,41.768 31.4,41.868 31.4,50.2 ; v1(32.2,50.2) 32.225,50.175 32.525,50.175 32.55,50.15 32.6,50.15 33,49.75 C809.2@33,49.7
PHY_TXCLK: R800.2 U800.20 | length 14
  L1 (Sig) w0.1: U800.20@33.985,38.315 v1(37.1,38.315) ; v1(37.1,45) R800.2@39.46,45
  L6 (Sig) w0.1: v1(37.1,38.315) 37.1,42.851 37.1,42.901 37.041,42.959 36.775,42.959 36.76,42.974 36.76,43.244 36.775,43.259 37.128,43.259 37.143,43.274 37.143,43.544 37.128,43.559 36.775,43.559 36.76,43.574 36.76,43.844 36.775,43.859 37.128,43.859 37.143,43.874 37.143,44.144 37.128,44.159 36.888,44.159 36.873,44.174 36.873,44.444 36.888,44.459 37.041,44.459 37.1,44.518 37.1,44.807 v1(37.1,45)
PHY_TXD0: R802.2 U800.22 | length 14
  L1 (Sig) w0.1: U800.22@33.985,39.315 v1(35,39.315) ; v1(35,47.6) R802.2@39.46,47.6
  L6 (Sig) w0.1: v1(35,39.315) 35,46.385 35,46.735 35.059,46.794 35.143,46.794 35.158,46.809 35.158,47.079 35.143,47.094 35.059,47.094 35,47.153 35,47.3 v1(35,47.6)
PHY_TXD1: R803.2 U800.23 | length 14
  L1 (Sig) w0.1: U800.23@33.985,39.815 v1(35.6,39.815) ; v1(35.6,46.3) R803.2@39.46,46.3
  L6 (Sig) w0.1: v1(35.6,39.815) 35.6,44.497 35.6,44.847 35.659,44.906 36.127,44.906 36.142,44.921 36.142,45.191 36.127,45.206 35.611,45.206 35.596,45.221 35.596,45.491 35.611,45.506 36.114,45.506 36.129,45.521 36.129,45.791 36.114,45.806 35.659,45.806 35.6,45.864 35.6,46.104 v1(35.6,46.3)
PHY_TXD2: R804.2 U800.24 | length 14.3
  L1 (Sig) w0.1: U800.24@33.985,40.315 34.6,40.315 34.65,40.315 34.709,40.374 34.709,40.465 34.724,40.48 34.994,40.48 35.009,40.465 35.009,40.317 35.024,40.302 35.294,40.302 35.309,40.317 35.309,40.465 35.324,40.48 35.594,40.48 35.609,40.465 35.609,40.317 35.624,40.302 35.894,40.302 35.909,40.317 35.909,40.465 35.924,40.48 36.194,40.48 36.209,40.465 36.209,40.317 36.224,40.302 36.494,40.302 36.509,40.317 36.509,40.465 36.524,40.48 36.794,40.48 36.809,40.465 36.809,40.317 36.824,40.302 37.094,40.302 37.109,40.317 37.109,40.465 37.124,40.48 37.394,40.48 37.409,40.465 37.409,40.374 37.467,40.315 37.938,40.315 v1(38.1,40.315) ; v1(38.1,43.7) R804.2@39.46,43.7
  L6 (Sig) w0.1: v1(38.1,40.315) 38.1,41.071 38.1,41.421 38.159,41.48 38.732,41.48 38.747,41.495 38.747,41.765 38.732,41.78 38.057,41.78 38.042,41.795 38.042,42.065 38.057,42.08 38.732,42.08 38.747,42.095 38.747,42.365 38.732,42.38 38.057,42.38 38.042,42.395 38.042,42.665 38.057,42.68 38.699,42.68 38.714,42.695 38.714,42.965 38.699,42.98 38.159,42.98 38.1,43.038 38.1,43.304 v1(38.1,43.7)
PHY_TXD3: R805.2 U800.25 | length 15.8
  L1 (Sig) w0.1: U800.25@33.3,41 33.3,41.841 33.359,41.9 v1(34.2,41.9) ; v1(34.2,41.1) 34.691,41.1 34.741,41.1 34.8,41.159 34.8,41.639 34.815,41.654 35.085,41.654 35.1,41.639 35.1,41.068 35.115,41.053 35.385,41.053 35.4,41.068 35.4,41.639 35.415,41.654 35.685,41.654 35.7,41.639 35.7,41.068 35.715,41.053 35.985,41.053 36,41.068 36,41.639 36.015,41.654 36.285,41.654 36.3,41.639 36.3,41.068 36.315,41.053 36.585,41.053 36.6,41.068 36.6,41.639 36.615,41.654 36.885,41.654 36.9,41.639 36.9,41.068 36.915,41.053 37.185,41.053 37.2,41.068 37.2,41.639 37.215,41.654 37.485,41.654 37.5,41.639 37.5,41.068 37.515,41.053 37.785,41.053 37.8,41.068 37.8,41.639 37.815,41.654 38.085,41.654 38.1,41.639 38.1,41.068 38.115,41.053 38.385,41.053 38.4,41.068 38.4,41.604 38.415,41.619 38.685,41.619 38.7,41.604 38.7,41.159 38.759,41.1 38.948,41.1 R805.2@39.46,41.1
  L6 (Sig) w0.1: v1(34.2,41.1) v1(34.2,41.9)
PHY_TXD4: R824.2 U800.18 | length 1.7
  L1 (Sig) w0.1: U800.18@33.985,37.315 35.497,37.315 35.582,37.4 v1(35.65,37.4)
PHY_TXEN: R801.2 U800.21 | length 14.3
  L1 (Sig) w0.1: U800.21@33.985,38.815 v1(36.285,38.815) ; v1(36.285,42.4) 36.862,42.4 36.912,42.4 36.971,42.459 36.971,42.855 36.986,42.87 37.256,42.87 37.271,42.855 37.271,42.398 37.286,42.383 37.556,42.383 37.571,42.398 37.571,42.817 37.586,42.832 37.856,42.832 37.871,42.817 37.871,42.459 37.929,42.4 38.21,42.4 R801.2@39.46,42.4
  L6 (Sig) w0.1: v1(36.285,38.815) 36.285,39.2 36.285,39.25 36.226,39.309 36.198,39.309 36.183,39.324 36.183,39.594 36.198,39.609 36.637,39.609 36.652,39.624 36.652,39.894 36.637,39.909 36.198,39.909 36.183,39.924 36.183,40.194 36.198,40.209 36.637,40.209 36.652,40.224 36.652,40.494 36.637,40.509 36.198,40.509 36.183,40.524 36.183,40.794 36.198,40.809 36.637,40.809 36.652,40.824 36.652,41.094 36.637,41.109 36.198,41.109 36.183,41.124 36.183,41.394 36.198,41.409 36.637,41.409 36.652,41.424 36.652,41.694 36.637,41.709 36.344,41.709 36.285,41.767 36.285,41.908 v1(36.285,42.4)
PHY_VDDCR: C803.1 C804.1 U800.6 | length 4.1
  L1 (Sig) w0.2: v1(28.4,37.8) 28.407,37.808 29.108,37.808 U800.6@29.115,37.815
  L8 (Sig) w0.2: v1(28.4,37.8) C804.1@30.125,37.8 C803.1@30.125,39.5
PHY_XTAL1: R815.2 R820.2 U800.5 | length 7
  L1 (Sig) w0.2: v1(25.15,36.1) R820.2@25.15,37.6 25.15,38.315 U800.5@29.115,38.315
  L8 (Sig) w0.2: R815.2@25.15,35.3 v1(25.15,36.1)
PHY_XTAL2: R821.2 U800.4 | length 4.8
  L1 (Sig) w0.2: R821.2@25.15,39.6 25.15,38.815 U800.4@29.115,38.815
PMIC_BYPASS: C304.1 U300.47 | length 1.6
  L1 (Sig) w0.2: U300.47@36.425,64.875 37.5,64.875 v1(37.5,65.1)
  L8 (Sig) w0.2: v1(37.5,65.1) 37.575,65.1 C304.1@37.575,64.85
PMIC_I2C_SCL: R320.1 R322.1 U300.28 | length 51
  L1 (Sig) w0.1: R322.1@16.26,27.3 15.559,27.3 15.5,27.359 15.5,30.141 15.559,30.2 16,30.2 16.1,30.3 16.1,34.183 16.041,34.241 15.559,34.241 15.5,34.3 15.5,44.241 15.559,44.3 16.641,44.3 16.7,44.359 v1(16.7,44.8) ; v1(22.8,44.8) 22.8,52.841 22.859,52.9 25.2,52.9 25.4,53.1 28.3,53.1 28.375,53.175 R320.1@28.375,54.35 ; R320.1@28.425,54.3 v1(29.35,54.3) ; v1(32.45,59.002) U300.28@32.45,60.1
  L8 (Sig) w0.1: v1(16.7,44.8) v1(22.8,44.8) ; v1(29.35,54.3) 29.783,54.3 29.9,54.417 29.9,58.433 30.017,58.55 32.3,58.55 32.45,58.7 v1(32.45,59.002)
PMIC_I2C_SDA: R321.1 R323.1 U300.27 | length 51.9
  L1 (Sig) w0.1: v1(16.2,26.6) 16.2,26.06 R323.1@16.26,26 ; v1(16.2,28.1) 16.2,29.7 16.5,30 16.5,34.5 16.4,34.6 15.959,34.6 15.9,34.659 15.9,43.941 15.959,44 17,44 17.1,44.1 v1(17.1,45.2) ; v1(23.2,45.2) 23.2,52.441 23.259,52.5 29.641,52.5 29.702,52.561 29.702,54.446 29.7,54.448 29.7,54.7 29.35,55.05 v1(29.35,56.6) R321.1@28.375,56.6 ; v1(31.65,59.002) 32.05,59.402 U300.27@32.05,60.1
  L8 (Sig) w0.1: v1(16.2,26.6) v1(16.2,28.1) ; v1(17.1,45.2) v1(23.2,45.2) ; v1(29.35,56.6) 29.35,58.883 29.469,59.002 v1(31.65,59.002)
PMIC_INT_LDO: C303.2 U300.48 | length 2.5
  L1 (Sig) w0.2: U300.48@36.425,65.275 36.65,65.275 v1(36.65,65.6)
  L8 (Sig) w0.2: v1(36.65,65.6) 36.65,66.6 C303.2@37.575,66.6
PMIC_L1: L300.1 U300.20
PMIC_L2: L301.1 U300.23
PMIC_L3: L302.1 U300.31
PMIC_LDO1_VOUT: R313.1 R314.1 R315.1 U300.3
PMIC_LDO2_VOUT: R316.1 U300.1
PMIC_LDO3_VOUT: R317.1 U300.40
PMIC_LDO4_VOUT: R319.1 U300.43
PMIC_LDO_PGOOD: R329.1 U300.46 | length 87
  L1 (Sig) w0.1: v1(14.7,20.7) v1(14.7,43.6) ; v1(15.6,20.7) R329.1@16.26,20.7 ; v1(25.5,43.6) v1(25.5,48) ; v1(33,48) 33,48.941 33.059,49 35.6,49 35.7,49.1 v1(35.7,49.6) ; v1(44.2,49.6) v1(44.2,57.4) ; v1(46.1,57.4) v1(46.1,64.4)
  L1 (Sig) w0.2: U300.46@36.425,64.475 39.125,64.475 v1(40,65.35)
  L4 (Sig) w0.1: v1(25.5,48) v1(33,48)
  L8 (Sig) w0.1: v1(14.7,20.7) v1(15.6,20.7) ; v1(14.7,43.6) v1(25.5,43.6) ; v1(35.7,49.6) v1(44.2,49.6) ; v1(40,65.35) 41.45,65.35 42.4,64.4 v1(46.1,64.4) ; v1(44.2,57.4) v1(46.1,57.4)
PMIC_nINT: R328.1 R330.1 U300.45 | length 86.2
  L1 (Sig) w0.1: v1(15.1,44) 15.1,19.359 15.159,19.3 R330.1@16.26,19.3 ; v1(32.6,44) v1(32.6,48.4) ; v1(38.6,48.4) v1(38.6,55.4) ; v1(45.7,55.4) v1(45.7,64)
  L1 (Sig) w0.2: U300.45@36.425,64.075 36.427,64.077 39.477,64.077 v1(40,64.6)
  L4 (Sig) w0.1: v1(29.6,44) v1(32.6,44)
  L8 (Sig) w0.1: v1(15.1,44) v1(29.6,44) ; v1(32.6,48.4) v1(38.6,48.4) ; v1(38.6,55.4) v1(45.7,55.4) ; v1(40,64.6) 40.4,64.6 41,64 v1(45.7,64)
PMIC_nRESET: C302.2 R304.1 SW301.1 U300.44 | length 81.6
  L1 (Sig) w0.1: SW301.1@3.45,35.5 4.641,35.5 4.7,35.559 v1(4.7,44) ; v1(32.2,44.4) v1(32.2,48.8) ; v1(44.6,49.2) v1(44.6,63.6)
  L1 (Sig) w0.2: v2(3.4,34.7) 3.4,35.45 SW301.1@3.45,35.5 ; U300.44@36.425,63.675 39.808,63.675 40.005,63.871 40.171,63.871 v1(40.2,63.9)
  L4 (Sig) w0.1: v1(30,44.4) v1(32.2,44.4)
  L8 (Sig) w0.1: v1(4.7,44) 4.7,44.341 4.759,44.4 v1(30,44.4) ; v1(32.2,48.8) 35,48.8 35.4,49.2 v1(44.6,49.2) ; v1(40.2,63.9) 40.5,63.6 v1(44.6,63.6)
  L8 (Sig) w0.2: v2(3.4,34.7) C302.2@3.4,33.875 3.425,33.85 R304.1@6,33.85